# Altium PCB PCB3.PcbDoc
Units mil, origin at the board's own origin, x right, y up, seen from the top; angles counter-clockwise.
Board outline 3145 x 3150 mil, 2 copper layers (Top Layer, Bottom Layer); 10 components, 8 nets, 25 pads, 0 vias.
Unrouted connection lines stored in the file: 3.
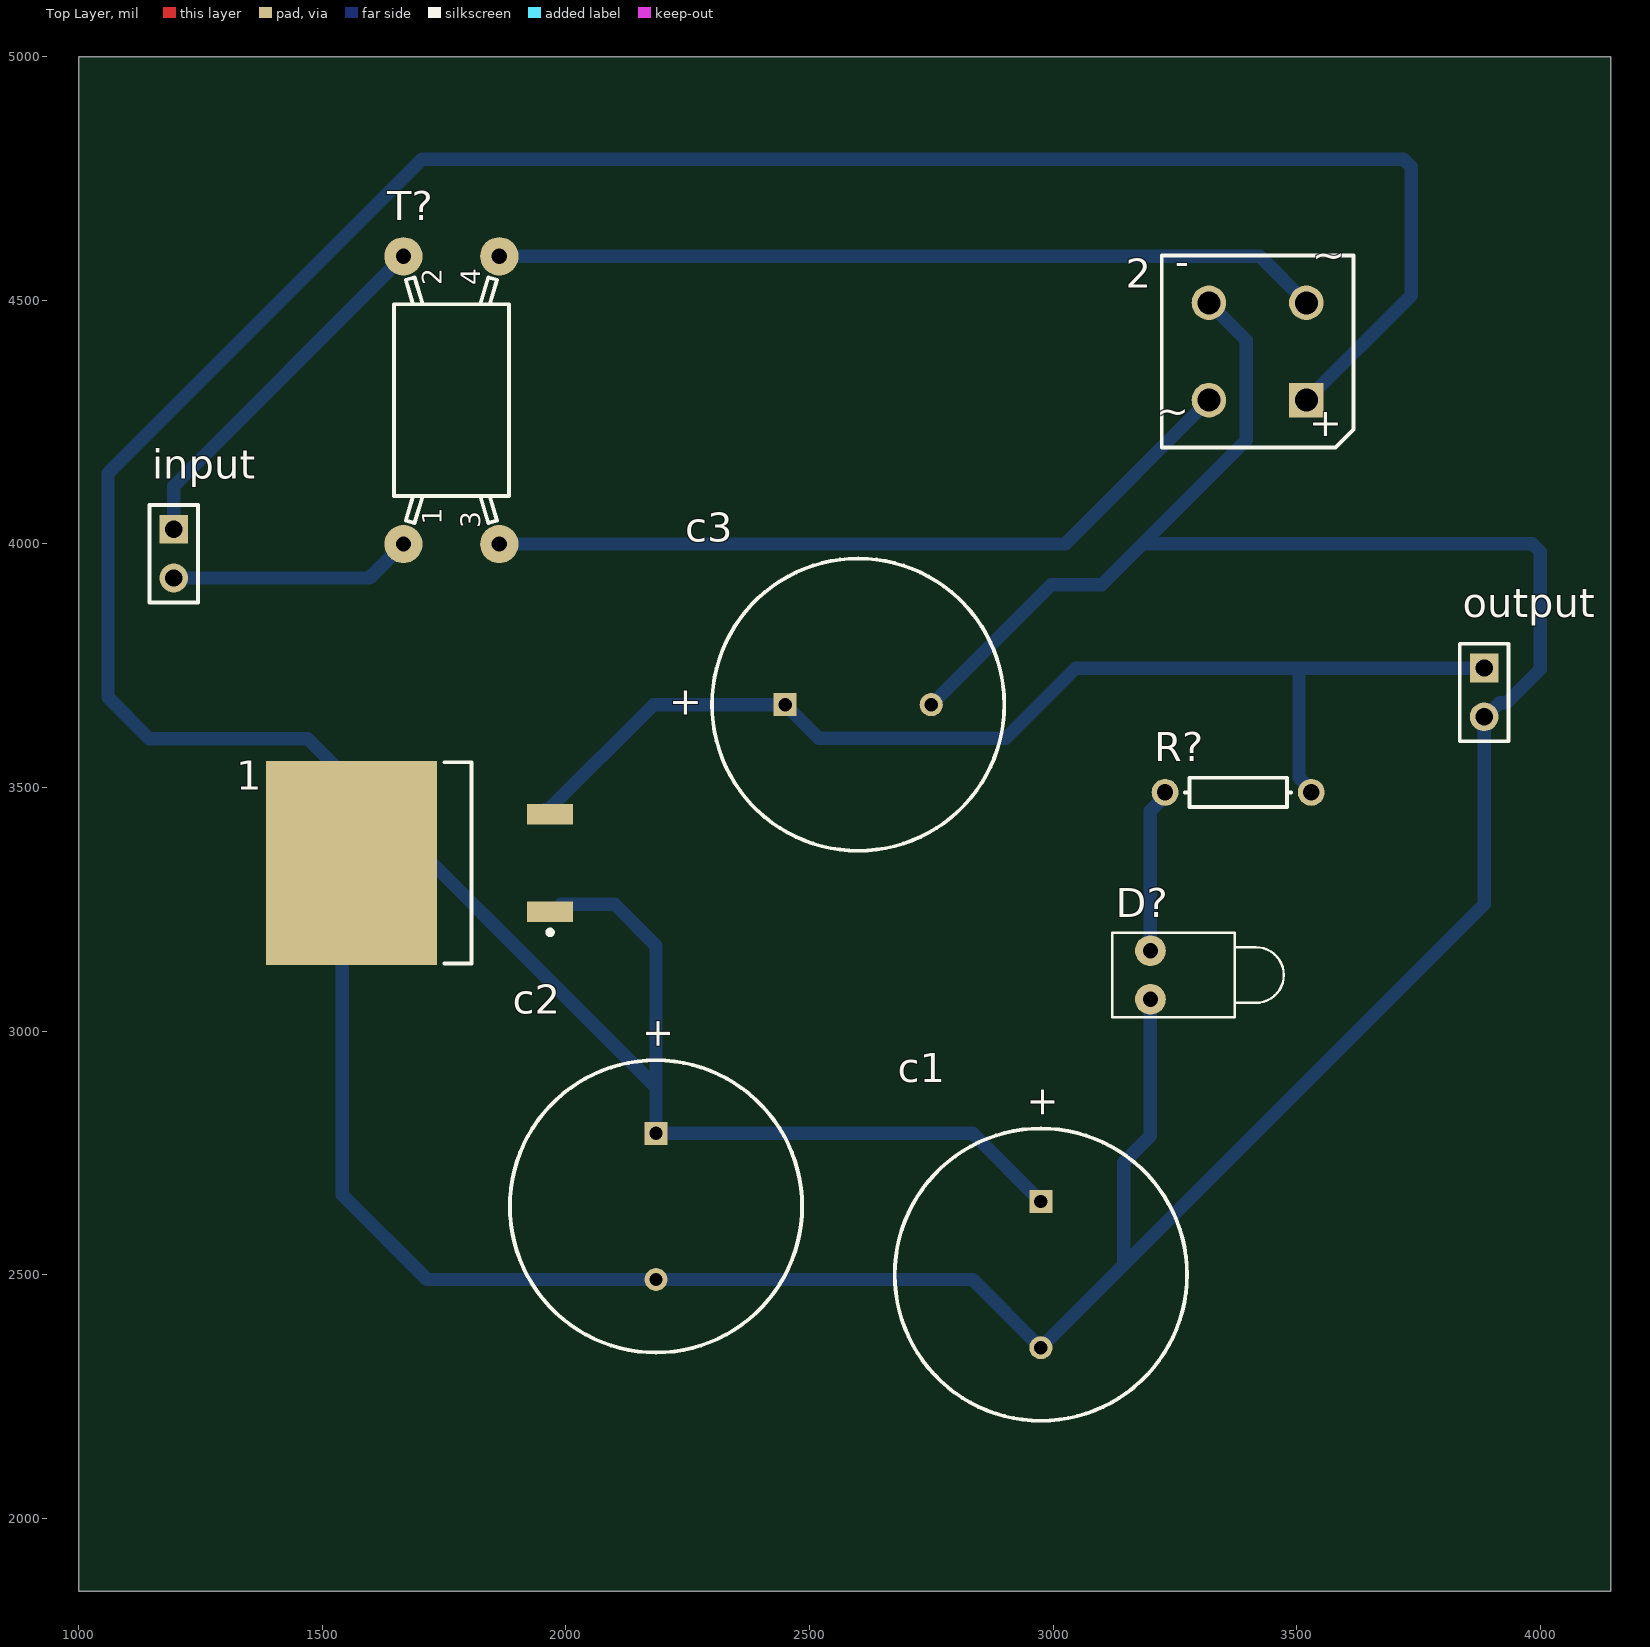
[diagram p0: Top Layer view]
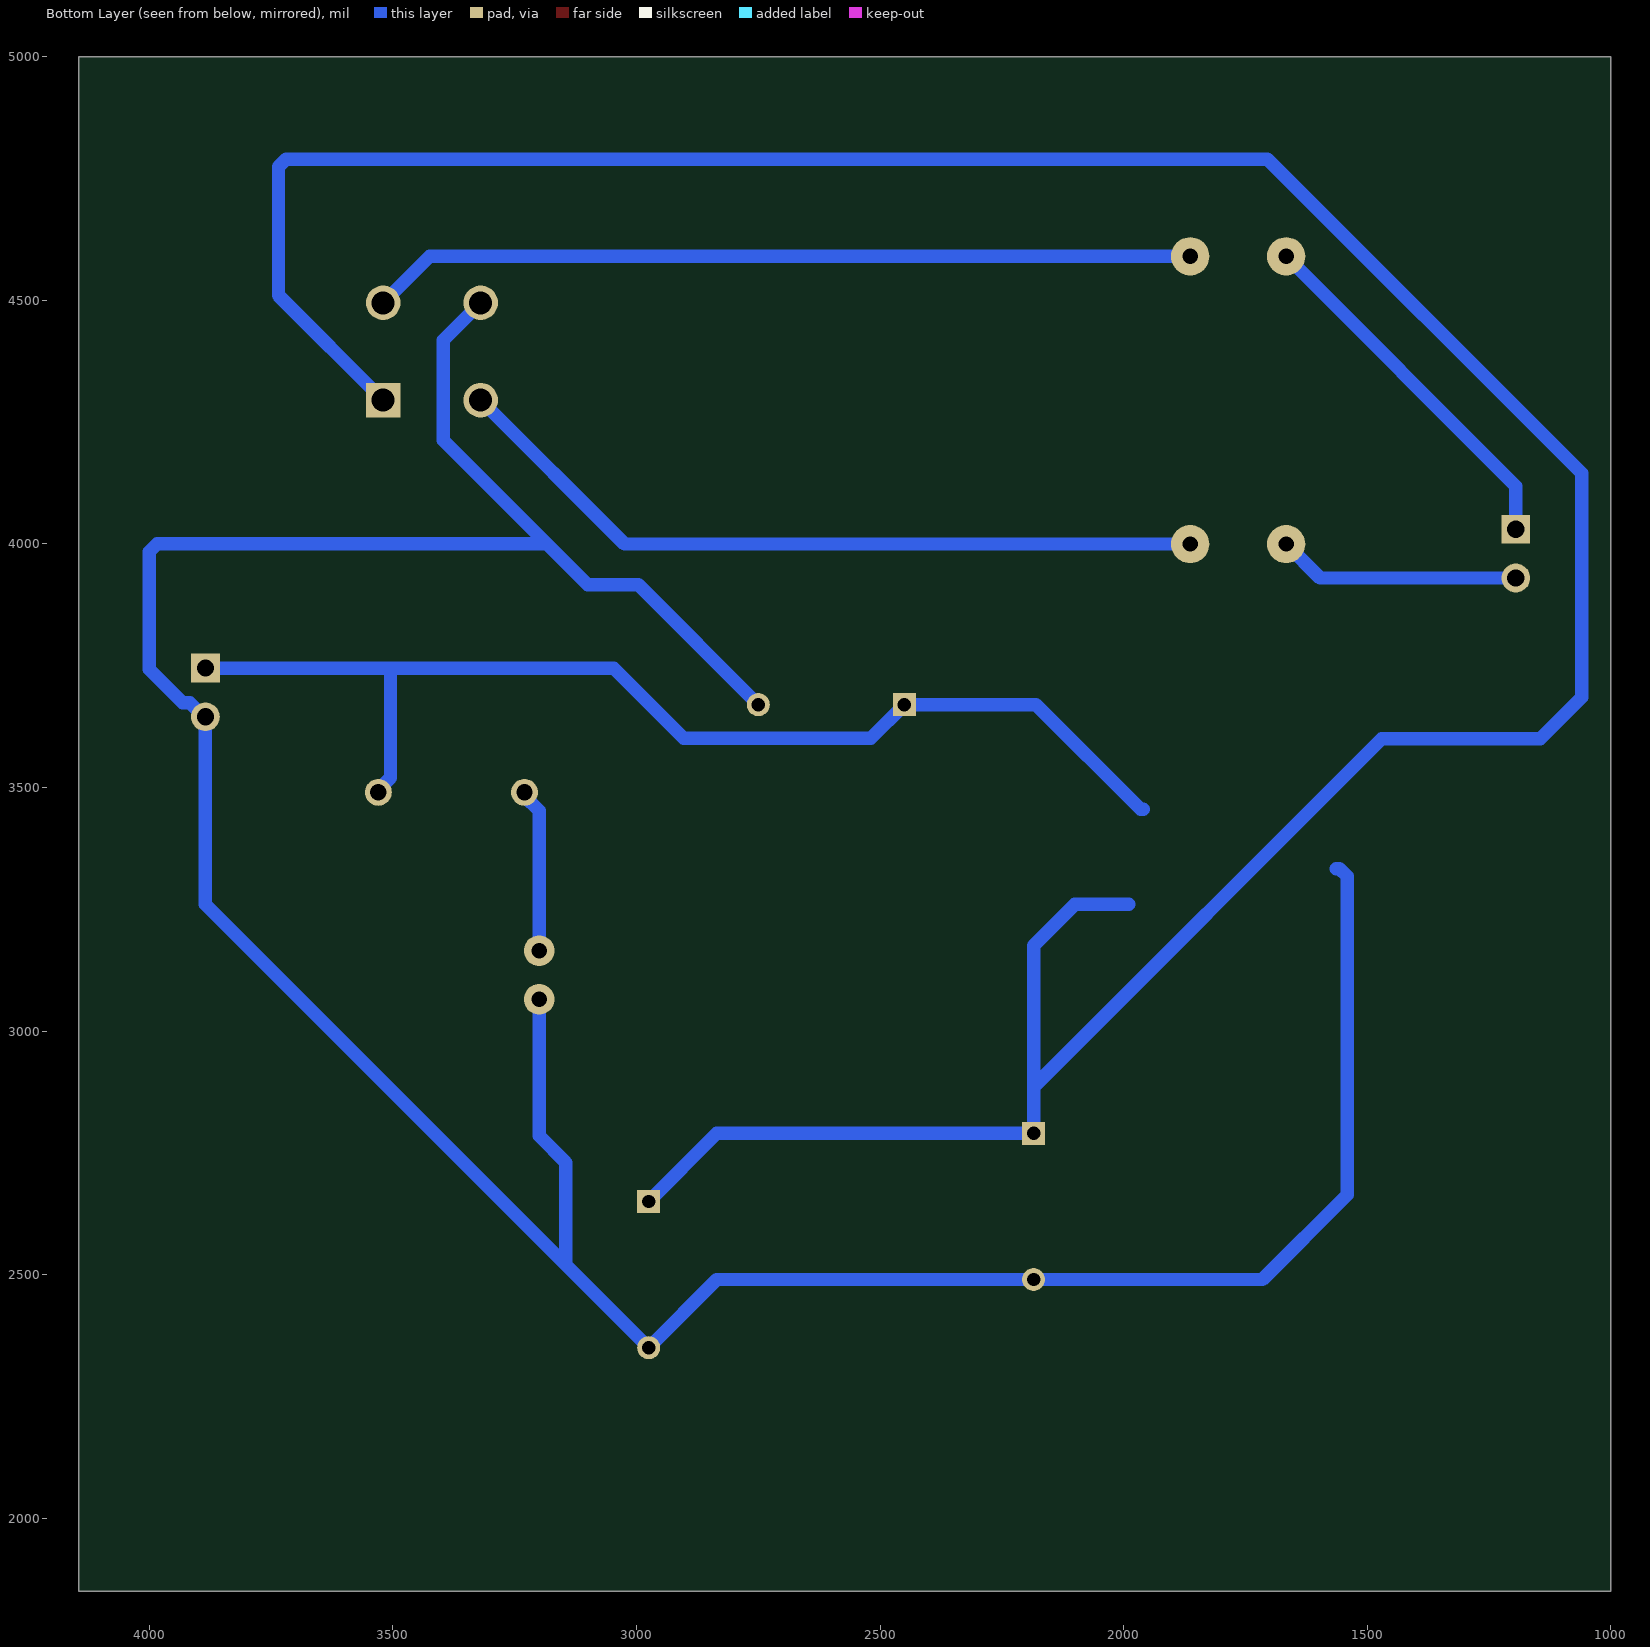
[diagram p1: Bottom Layer view, seen from below]

## Layer stack, top to bottom
Top Solder: solder mask 0.4, Solder Resist, Dk 3.5
Top Layer: signal copper 1.4
Dielectric 1: dielectric 12.6, FR-4, Dk 4.8
Bottom Layer: signal copper 1.4
Bottom Solder: solder mask 0.4, Solder Resist, Dk 3.5

## Board outline
1000,1850 4145,1850 4145,5000 1000,5000

## Design rules (kind name [scope] priority, off if disabled: settings)
Clearance [All] p1: gap=27.56 ignorepadtopadclearanceinfootprint=FALSE
PolygonConnect [All] p1: connectstyle=Direct reliefconductorwidth=10 reliefentries=4 polygonreliefangle="90 Angle" airgapwidth=10
RoutingLayers [All] p1: top layer_v5=FALSE bottom layer_v5=TRUE
RoutingVias [All] p1: holewidth=28 width=50 viastyle="Through Hole" minholewidth=28 minwidth=50 maxholewidth=28 maxwidth=50
SolderMaskExpansion [All] p1: expansion=4 istentingtop=FALSE
Width [All] p1: maxlimit=27.56 minlimit=27.56 preferedwidth=27.56
29 further rules are at their usual default settings.

## Components (designator, comment, footprint, x,y, rotation, side; value= is the part's Value field where it differs from the comment)
1 "3" D2PAK_N 1699.76,3345 r180 top
2 "Bridge" D-38 3420,4395 r180 top
c1 "470uf" RB7.6-15 2975,2500 r90 top value=25v
c2 "0.1uf" RB7.6-15 2185,2640 r90 top
c3 "2" RB7.6-15 2600,3670 r180 top value=0.1uf
D? "LED1" LED-1 3200,3115 r0 top
input "230v" HDR1X2 1195,4030 r270 top
output "Header 2" HDR1X2 3885,3745 r270 top
R? "Res1" AXIAL-0.3 3380,3490 r0 top value=1K
T? "Trans" TRANS 1765,4295 r90 top

## Footprints (in the part's own frame and the unit in brackets; to place one, negate y for a bottom-side part, rotate by r counter-clockwise, add the part's x,y. Pads: shape width x height; smd on the part's side, far side on the other; paste and mask are expansions set on the pad)
AXIAL-0.3 [mm] "Axial Device, Thru-Hole; 2 Leads; 0.3 in Pin Spacing"
  round 1.4 hole 0.85: 1(-3.81,0) 2(3.81,0)
  silkscreen extent -2.77,-0.76 2.77,0.76
D2PAK_N [mm] "D2-PAK, 4-Leads, Body 8.8x10.4mm, Pitch 2.54mm, Lead Span 15.1mm, IPC Medium Density"
  rect 2.4x1.05 smd: 1(-6.8,2.54) 3(-6.8,-2.54)
  rect 8.9x10.65 smd: 2(3.55,0)
  silkscreen extent -6.93,-5.25 -1.3,5.25, body extent -2.7,-5.28 6.3,5.28, height 4.69
D-38 [mm] "Bridge Rectifier; 4 Terminals; Body 9.4 x 9.4 mm (typ); Pitch 5.08 mm"
  rect 1.8x1.8 hole 1.2: 1(-2.54,2.54)
  round 1.8 hole 1.2: 2(-2.54,-2.54) 3(2.54,-2.54) 4(2.54,2.54)
  silkscreen extent -5,-5 5,5, body extent -5,-5 5,5, height 9.91
HDR1X2 [mm] "Connector; Header; 2 Position"
  rect 1.5x1.5 hole 0.9: 1(0,0)
  round 1.5 hole 0.9: 2(2.54,0)
  silkscreen extent -1.27,-1.27 3.81,1.27
LED-1 [mm] "LED; 2 Leads"
  round 1.6 hole 0.8: 1(0,1.27) 2(0,-1.27)
  silkscreen extent -2,-2.2 6.95,2.2
RB7.6-15 [mm] "Polarized Capacitor (Radial); 2 Leads"
  rect 1.2x1.2 hole 0.7: 1(3.81,0)
  round 1.2 hole 0.7: 2(-3.81,0)
  silkscreen extent -7.62,-7.62 7.62,7.62
TRANS [mm] "Transformer; 4 Leads"
  round 2 hole 0.8: 1(-7.5,2.5) 2(7.5,2.5) 3(-7.5,-2.5) 4(7.5,-2.5)
  silkscreen extent -6.4,-3 6.4,3

## Part data
1: library part "Volt Reg", "Voltage Regulator", LatestRevisionDate=29-May-2009, LatestRevisionNote="IPC-7351 Footprint Added.", PackageDescription="3-Pin Transistor Outline Package 2.54 mm Pitch, 15.1 mm Lead Span", PackageReference=D2PAK, Published=24-Mar-1999, Publisher="Altium Limited"
2: library part Bridge1, "Full Wave Diode Bridge", DatasheetVersion=E2732B, LatestRevisionDate=29-May-2009, LatestRevisionNote="Sch pins A & K swapped.", PackageDescription="Bridge Rectifier; 4 Terminals; Body 9.4 x 9.4 mm (typ); Pitch 5.08 mm", PackageReference=D-38, Published=8-Jun-2000, Publisher="Altium Limited"
c1 c2 c3: library part "Cap Pol1", "Polarized Capacitor (Radial)", LatestRevisionDate=17-Jul-2002, LatestRevisionNote="Re-released for DXP Platform.", PackageDescription="Polarized Capacitor (Radial); 2 Leads", PackageReference=RB7.6-15, Published=8-Jun-2000, Publisher="Altium Limited"
D?: "Typical RED GaAs LED", LatestRevisionDate=08-Jul-2005, LatestRevisionNote="Mech Layer 1 removed.", PackageDescription="LED; 2 Leads", PackageReference=LED-1, Published=8-Jun-2000, Publisher="Altium Limited"
input: library part "Header 2", "Header, 2-Pin", LatestRevisionDate=17-Jul-2002, LatestRevisionNote="Re-released for DXP Platform.", Publisher="Altium Limited"
output: "Header, 2-Pin", LatestRevisionDate=17-Jul-2002, LatestRevisionNote="Re-released for DXP Platform.", Publisher="Altium Limited"
R?: "Resistor", LatestRevisionDate=17-Jul-2002, LatestRevisionNote="Re-released for DXP Platform.", PackageDescription="Axial Device, Thru-Hole; 2 Leads; 0.3 in Pin Spacing", PackageReference=AXIAL-0.3, Published=8-Jun-2000, Publisher="Altium Limited"
T?: "Transformer", LatestRevisionDate=08-Jul-2005, LatestRevisionNote="Mech Layer 1 removed.", PackageDescription="Transformer; 4 Leads", PackageReference=TRANS, Published=24-Mar-1999, Publisher="Altium Limited"

## Nets (pads, with @x,y where several pads share a name; then routed paths per layer and width w, separated by ;. In a path a pad name is that pad's centre, name@x,y a point inside that pad or via, vN(x,y) a via of type N, cw(c..) or ccw(c..) an arc to the next point about the centre after c; other vN are vias at no path point)
GND: 1.2 2.3 c1.2 c2.2 c3.2 D?.2 output.2 | length 6891.6
  Bottom Layer w27.56: 1563.53,3333.53 1557.17,3333.53 1541.03,3317.38 1541.03,2663.97 1715,2490 c2.2 2835,2490 c1.2 3145,2520 ; c3.2 2996,3916 3100,3916 3184,4000 ; D?.2 3200,2785 3145,2730 3145,2520 ; 2.3 3397,4418 3397,4213 3184,4000 ; 3145,2520 3885,3260 output.2 3887.76,3645 3916.89,3674.13 3931.65,3674.13 4000,3742.48 4000,3983.86 3983.86,4000 3184,4000
Net1_1: 1.1 2.1 c1.1 c2.1 | length 6896.3
  Bottom Layer w27.56: 1990,3260 2100,3260 2185,3175 2185,2885 ; c1.1 2835,2790 c2.1 2185,2885 ; 2.1 3735,4510 3735,4773.86 3718.86,4790 1705,4790 1060,4145 1060,3685 1145,3600 1470,3600 2185,2885
Net1_3: 1.3 c3.1 output.1 R?.2 | length 2367.6
  Bottom Layer w27.56: 1960,3455 1965,3455 2180,3670 c3.1 2519,3601 2903,3601 3047,3745 3505,3745 ; R?.2 3530,3494.92 3505,3519.92 3505,3745 ; output.1 3505,3745
Net2_2: 2.2 T?.4 | length 1696
  Bottom Layer w27.56: T?.4 3424.72,4590.28 2.2
Net2_4: 2.4 T?.3 | length 1578.9
  Bottom Layer w27.56: T?.3 3024.72,3999.72 2.4
NetD?_1: D?.1 R?.1 | length 337.4
  Bottom Layer w27.56: D?.1 3200,3452.54 3230,3482.54 R?.1
Netinput_1: input.1 T?.2 | length 755.6
  Bottom Layer w27.56: input.1 1195,4118.7 T?.2
Netinput_2: input.2 T?.1 | length 500.5
  Bottom Layer w27.56: input.2 1596.85,3930 T?.1

## Dimensions
990,5000 to 990,1845 on Top Layer
1000,5025 to 4155,5060 on Top Layer

## Text inside footprints (layer, text, board x,y; h text height)
2: Top Overlay "+" at 3593.62,4270.43 h59.06 r180; Top Overlay "-" at 3280,4595 h59.05 r180; Top Overlay "~" at 3600,4615 h59.05 r180; Top Overlay "~" at 3280,4295 h59.05 r180
c1: Top Overlay "+" at 3004.01,2820.15 h59.06 r90
c2: Top Overlay "+" at 2214.01,2960.15 h59.06 r90
c3: Top Overlay "+" at 2279.85,3699.01 h59.06 r180
T?: Top Overlay "1" at 1745.32,4039.09 h39.37 r90; Top Overlay "2" at 1745.32,4531.22 h39.37 r90; Top Overlay "3" at 1824.06,4032.2 h39.37 r90; Top Overlay "4" at 1824.06,4531.22 h39.37 r90